# Altium PCB RF-UNIT-QRP.PcbDoc (part 3 of 3)
Units mm, origin at the board's own origin, x right, y up, seen from the top; angles counter-clockwise.
Board outline 187 x 77 mm, 2 copper layers (Top Layer, Top, Bottom Layer, Bottom); 258 components, 175 nets, 770 pads, 3772 vias.
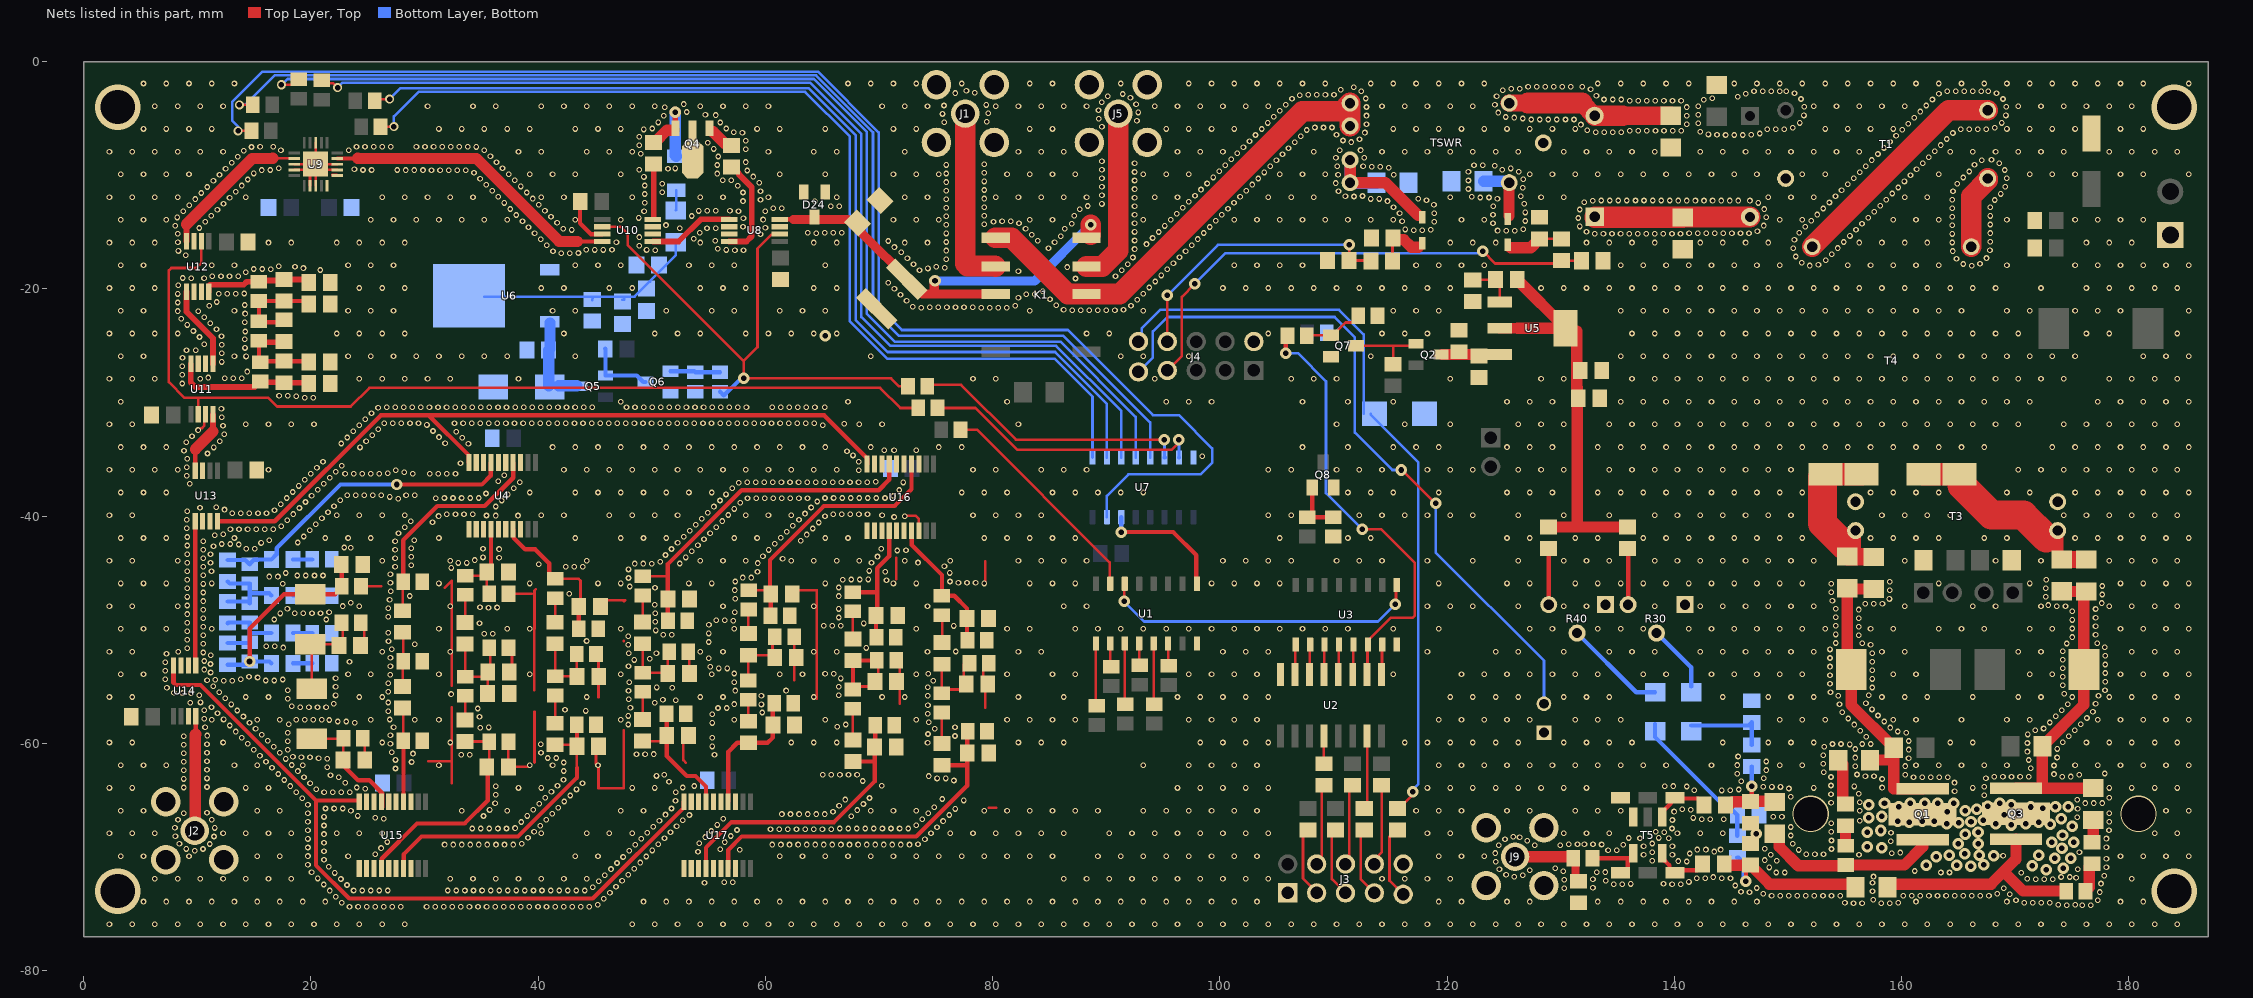
[diagram p3: the nets of this part, all layers, seen from the top]

## Via types
v1: diameter 0.5, hole 0.3, Top Layer, Top to Bottom Layer, Bottom, tented both sides, 3631 vias
v2: diameter 1.016, hole 0.486, Top Layer, Top to Bottom Layer, Bottom, tented both sides, 127 vias
v3: diameter 0.8, hole 0.486, Top Layer, Top to Bottom Layer, Bottom, tented both sides, 6 vias
v4: diameter 4, hole 3, Top Layer, Top to Bottom Layer, Bottom, 4 vias
v5: diameter 1, hole 0.5, Top Layer, Top to Bottom Layer, Bottom, 2 vias
v6: diameter 3.2, hole 3, Top Layer, Top to Bottom Layer, Bottom, 2 vias

## Nets (pads, with @x,y where several pads share a name; then routed paths per layer and width w, separated by ;. In a path a pad name is that pad's centre, name@x,y a point inside that pad or via, vN(x,y) a via of type N, cw(c..) or ccw(c..) an arc to the next point about the centre after c; other vN are vias at no path point) (continued)
GND: (continued)
  other v1: 147.271,-9.923 151.271,-9.923 153.271,-9.923 163.271,-9.923 171.271,-9.923 173.271,-9.923 175.271,-9.923 179.271,-9.923 181.271,-9.923 185.271,-9.923 14.976,-9.84 55.759,-9.852 75.918,-9.843 79.276,-9.788 34.356,-9.768 103.913,-9.752 92.496,-9.709 156.318,-9.727 121.879,-9.703 126.302,-9.701 99.942,-9.659 165.948,-9.665 58.413,-9.581 15.669,-9.543 16.423,-9.535 24.586,-9.534 25.34,-9.535 27.602,-9.539 28.356,-9.541 29.11,-9.542 29.864,-9.544 30.618,-9.545 31.372,-9.547 32.126,-9.548 32.88,-9.549 33.633,-9.551 169.078,-9.534 48.901,-9.517 89.622,-9.508 124.865,-9.502 23.833,-9.484 161.319,-9.476 12.49,-9.43 51.43,-9.435 17.161,-9.379 36.868,-9.385 52.07,-9.398 125.612,-9.397 114.86,-9.343 113.357,-9.254 114.111,-9.254 104.446,-9.219 110.328,-9.209 112.604,-9.208 156.851,-9.194 124.19,-9.166 100.475,-9.126 122.371,-9.132 123.125,-9.127 55.759,-9.098 75.918,-9.089 166.414,-9.073 79.276,-9.034 92.496,-8.955 161.852,-8.943 168.597,-8.953 13.023,-8.897 36.335,-8.852 58.287,-8.838 89.622,-8.754 104.979,-8.686 167.059,-8.683 157.384,-8.661 167.914,-8.635 101.008,-8.593 110.216,-8.463 112.716,-8.462 162.385,-8.41 13.557,-8.364 55.853,-8.349 35.801,-8.319 105.512,-8.152 49.044,-8.107 157.917,-8.128 101.542,-8.06 2.271,-7.923 4.271,-7.923 6.271,-7.923 8.271,-7.923 10.271,-7.923 12.271,-7.923 38.271,-7.923 40.271,-7.923 44.271,-7.923 46.271,-7.923 48.271,-7.923 60.271,-7.923 64.271,-7.923 66.271,-7.923 72.271,-7.923 82.271,-7.923 84.271,-7.923 86.271,-7.923 96.271,-7.923 98.271,-7.923 100.271,-7.923 108.271,-7.923 114.271,-7.923 116.271,-7.923 118.271,-7.923 120.271,-7.923 122.271,-7.923 124.271,-7.923 126.271,-7.923 130.271,-7.923 132.271,-7.923 134.271,-7.923 136.271,-7.923 138.271,-7.923 142.271,-7.923 144.271,-7.923 146.271,-7.923 148.271,-7.923 150.271,-7.923 152.271,-7.923 154.271,-7.923 156.271,-7.923 164.271,-7.923 166.271,-7.923 168.271,-7.923 170.271,-7.923 172.271,-7.923 174.271,-7.923 178.271,-7.923 180.271,-7.923 182.271,-7.923 184.271,-7.923 162.918,-7.877 14.09,-7.831 17.364,-7.802 23.326,-7.81 35.264,-7.789 110.546,-7.785 112.385,-7.784 58.287,-7.706 55.451,-7.681 106.046,-7.619 158.45,-7.595 102.075,-7.526 14.775,-7.515 15.528,-7.498 24.013,-7.499 29.291,-7.495 30.045,-7.497 30.799,-7.498 31.553,-7.5 32.307,-7.501 33.061,-7.502 33.815,-7.504 34.566,-7.505 16.675,-7.495 24.767,-7.487 25.521,-7.488 26.275,-7.489 27.029,-7.491 48.901,-7.367 163.451,-7.344 54.918,-7.148 106.579,-7.086 111.577,-7.079 158.983,-7.062 102.608,-6.993 58.287,-6.952 110.837,-6.939 112.287,-6.824 163.985,-6.81 48.901,-6.613 107.112,-6.553 159.517,-6.528 103.141,-6.46 144.51,-6.455 145.264,-6.455 146.018,-6.455 110.27,-6.441 143.756,-6.436 146.772,-6.446 143.002,-6.407 147.516,-6.324 164.518,-6.277 57.983,-6.262 112.768,-6.244 57.23,-6.214 133.072,-6.205 133.826,-6.205 134.58,-6.205 135.334,-6.205 142.291,-6.157 136.077,-6.078 136.831,-6.078 137.585,-6.078 138.339,-6.078 139.093,-6.078 139.847,-6.071 140.601,-6.068 132.335,-6.045 107.645,-6.02 160.05,-5.995 49.289,-5.966 148.174,-5.956 148.928,-5.956 149.682,-5.956 165.2,-5.956 165.954,-5.956 166.708,-5.956 167.462,-5.956 5.271,-5.923 7.271,-5.923 9.271,-5.923 11.271,-5.923 31.271,-5.923 33.271,-5.923 35.271,-5.923 37.271,-5.923 39.271,-5.923 43.271,-5.923 45.271,-5.923 47.271,-5.923 59.271,-5.923 61.271,-5.923 65.271,-5.923 71.271,-5.923 73.271,-5.923 83.271,-5.923 85.271,-5.923 95.271,-5.923 97.271,-5.923 99.271,-5.923 101.271,-5.923 103.674,-5.927 115.271,-5.923 117.271,-5.923 119.271,-5.923 121.271,-5.923 123.271,-5.923 125.271,-5.923 127.271,-5.923 129.271,-5.923 131.271,-5.923 153.271,-5.923 155.271,-5.923 157.271,-5.923 159.271,-5.923 169.271,-5.923 171.271,-5.923 173.271,-5.923 175.271,-5.923 179.271,-5.923 181.271,-5.923 50.038,-5.884 56.552,-5.886 150.424,-5.825 168.204,-5.825 108.366,-5.799 109.12,-5.799 109.874,-5.799 89.622,-5.738 131.778,-5.538 112.903,-5.502 141.103,-5.506 160.583,-5.462 142.091,-5.431 104.207,-5.394 151.043,-5.395 168.823,-5.395 50.571,-5.351 56.016,-5.356 75.743,-5.34 79.471,-5.29 92.702,-5.214 127.402,-5.09 128.156,-5.09 128.91,-5.09 129.664,-5.09 130.418,-5.09 131.172,-5.09 89.354,-5.033 126.653,-5.001 125.903,-4.923 161.116,-4.929 104.741,-4.861 125.15,-4.875 51.049,-4.768 112.903,-4.748 141.103,-4.752 151.406,-4.734 169.186,-4.734 55.641,-4.702 142.091,-4.677 54.724,-4.667 75.586,-4.602 79.608,-4.548 124.508,-4.48 92.825,-4.47 53.094,-4.432 161.649,-4.396 105.274,-4.327 89.318,-4.28 51.14,-4.019 112.903,-3.994 141.103,-3.998 151.443,-3.98 169.223,-3.98 6.271,-3.923 8.271,-3.923 10.271,-3.923 12.271,-3.923 30.271,-3.923 34.271,-3.923 36.271,-3.923 40.271,-3.923 42.271,-3.923 44.271,-3.923 46.271,-3.923 48.271,-3.923 50.271,-3.923 54.271,-3.923 56.271,-3.923 58.271,-3.923 60.271,-3.923 70.271,-3.923 72.271,-3.923 74.271,-3.923 80.271,-3.923 82.271,-3.923 84.271,-3.923 86.271,-3.923 88.271,-3.923 94.271,-3.923 96.271,-3.923 98.271,-3.923 100.271,-3.923 102.271,-3.923 104.271,-3.923 114.271,-3.923 116.271,-3.923 118.271,-3.923 120.271,-3.923 122.271,-3.923 142.107,-3.923 152.271,-3.923 154.271,-3.923 156.271,-3.923 158.271,-3.923 160.271,-3.923 170.271,-3.923 172.271,-3.923 174.271,-3.923 176.271,-3.923 178.271,-3.923 180.271,-3.923 162.182,-3.863 75.72,-3.86 79.453,-3.81 105.807,-3.794 124.209,-3.788 92.624,-3.743 52.806,-3.736 89.597,-3.58 136.067,-3.436 136.821,-3.436 137.575,-3.436 138.329,-3.436 139.083,-3.436 139.837,-3.443 140.591,-3.444 133.813,-3.332 134.567,-3.332 135.321,-3.33 142.591,-3.345 162.715,-3.33 151.145,-3.288 168.925,-3.288 106.348,-3.269 112.837,-3.243 143.335,-3.22 92.132,-3.172 145.587,-3.096 90.143,-3.059 124.356,-3.048 133.142,-2.989 107.032,-2.953 107.786,-2.926 108.54,-2.926 109.294,-2.926 110.048,-2.926 91.452,-2.845 146.296,-2.839 163.288,-2.839 150.575,-2.794 168.355,-2.794 76.716,-2.765 78.427,-2.744 112.44,-2.602 147.014,-2.609 147.767,-2.597 148.521,-2.597 149.275,-2.597 149.845,-2.604 164.006,-2.609 164.76,-2.597 165.514,-2.597 166.268,-2.597 167.022,-2.597 167.625,-2.604 77.696,-2.561 124.895,-2.521 110.653,-2.476 132.628,-2.437 125.636,-2.382 126.39,-2.382 111.772,-2.252 127.126,-2.217 127.88,-2.216 128.634,-2.216 129.388,-2.216 130.142,-2.216 130.896,-2.216 131.905,-2.223 5.271,-1.923 7.271,-1.923 9.271,-1.923 11.271,-1.923 13.271,-1.923 67.271,-1.923 69.271,-1.923 71.271,-1.923 73.271,-1.923 77.271,-1.923 83.271,-1.923 85.271,-1.923 91.271,-1.923 97.271,-1.923 99.271,-1.923 101.271,-1.923 103.271,-1.923 105.271,-1.923 107.271,-1.923 109.271,-1.923 113.271,-1.923 115.271,-1.923 117.271,-1.923 119.271,-1.923 121.271,-1.923 123.271,-1.923 133.271,-1.923 135.271,-1.923 137.271,-1.923 139.271,-1.923 141.271,-1.923 145.271,-1.923 147.271,-1.923 149.271,-1.923 151.271,-1.923 153.271,-1.923 155.271,-1.923 157.271,-1.923 159.271,-1.923 161.271,-1.923 163.271,-1.923 165.271,-1.923 167.271,-1.923 169.271,-1.923 171.271,-1.923 173.271,-1.923 175.271,-1.923 177.271,-1.923 179.271,-1.923 181.271,-1.923 185.271,-1.923
  other v2: 172.72,-71.12 174.244,-70.993 166.074,-70.824 171.514,-70.751 162.179,-70.739 164.846,-70.739 167.235,-70.679 173.482,-70.104 174.879,-70.104 163.068,-69.977 168.105,-69.881 164.211,-69.85 166.836,-69.845 172.085,-69.85 165.566,-69.7 158.239,-69.192 174.117,-69.215 156.972,-69.088 164.973,-68.834 166.751,-68.834 173.228,-68.707 175.133,-68.707 174.162,-68.067 165.602,-67.995 147.193,-67.945 156.972,-67.818 166.727,-67.814 158.167,-67.669 175.006,-67.31 169.672,-67.183 173.074,-67.124 163.957,-67.056 168.275,-67.056 170.942,-67.056 165.022,-66.979 160.67,-66.943 166.11,-66.907 172.085,-66.929 162.882,-66.871 159.654,-66.834 161.83,-66.834 167.198,-66.762 174.053,-66.653 157.099,-66.548 158.239,-66.435 169.037,-66.294 170.307,-66.167 164.039,-66.015 165.608,-65.913 166.624,-65.786 172.421,-65.71 171.369,-65.601 159.763,-65.565 173.546,-65.565 174.67,-65.565 167.597,-65.528 157.099,-65.405 169.672,-65.405 158.496,-65.278 160.782,-65.278 162.052,-65.278 163.195,-65.278 164.592,-65.278 168.656,-65.278 65.278,-24.13
  other v4: 3,-73 184,-73 3,-4 184,-4
  other v6: 152,-66.2 180.848,-66.2
LNA_ON: R31.2 R84.1 U8.2 U10.2 | length 49.9
  Top Layer, Top w0.23: U10.2@45.654,-14.534 47.3,-14.534 47.879,-15.113 47.879,-16.129 58.094,-26.344 ; U8.2@61.28,-15.184 61.245,-15.219 60.55,-15.219 59.309,-16.46 59.309,-25.129 58.094,-26.344 ; R84.1@72.556,-28.575 71.755,-28.575 71.062,-27.882 v2(58.094,-27.882) 58.094,-26.344
  Bottom Layer, Bottom w0.381: R31.2@56.007,-29.044 56.344,-29.381 57.843,-27.882 v2(58.094,-27.882)
LPF_ON: R85.1 U11.2 U12.2 | length 84.6
  Top Layer, Top w0.23: U11.2@10.089,-31.054 10.089,-29.647 10.033,-29.591 ; U12.2@10.358,-15.809 10.358,-17.709 9.906,-18.161 7.716,-18.161 7.493,-18.384 7.493,-28.194 8.89,-29.591 10.033,-29.591 ; R85.1@73.445,-30.48 71.882,-30.48 70.104,-28.702 66.725,-28.702 66.719,-28.708 25.14,-28.708 23.495,-30.353 17.018,-30.353 16.256,-29.591 10.033,-29.591
MB_ALC: D2.1 J4.10 R12.2 | length 66.7
  Top Layer, Top w0.23: R12.2@115.63,-65.731 115.73,-65.731 116.845,-64.615 116.845,-64.384 v2(116.967,-64.262)
  Bottom Layer, Bottom w0.23: J4.10@92.837,-24.638 93.118,-24.357 93.118,-23.468 94.742,-21.844 110.49,-21.844 112.649,-24.003 D2.1@112.649,-30.988 ; D2.1@113.284,-30.988 113.284,-31.084 117.475,-35.275 117.475,-63.564 116.967,-64.072 v2(116.967,-64.262)
MB_THERM: J4.9 R13.2 R14.2 | length 64.3
  Top Layer, Top w0.23: v2(115.951,-35.941) 116.014,-35.941 118.935,-38.862 v2(118.999,-38.862)
  Bottom Layer, Bottom w0.23: J4.9@92.837,-27.305 94.107,-26.035 94.107,-23.749 95.377,-22.479 110.109,-22.479 110.807,-23.177 ; R13.2@109.601,-23.876 110.109,-23.876 110.807,-23.177 ; v2(115.951,-35.941) 115.189,-35.941 111.887,-32.639 111.887,-24.257 110.807,-23.177 ; v2(118.999,-38.862) 118.999,-43.18 128.524,-52.705 R14.2@128.524,-56.515
NetC5_1: C5.1 C6.2 L2.2 | length 4.8
  Top Layer, Top w0.23: C6.2@28.07,-54.993 28.07,-52.812 L2.2@28.116,-52.766 28.116,-50.272 C5.1@28.07,-50.226
NetC5_2: C5.2 L1.2 U4.4 | length 19.5
  Top Layer, Top w0.23: C5.2@28.07,-48.326 28.07,-45.827 L1.2@28.116,-45.781
  Top Layer, Top w0.381: L1.2@28.116,-45.781 28.116,-42.115 31.115,-39.116 35.306,-39.116 37.805,-36.617 U4.4@37.805,-35.289
NetC6_1: C6.1 L3.2 U15.4 | length 8.3
  Top Layer, Top w0.23: L3.2@28.07,-59.797 L3.2@28.116,-59.751 28.116,-56.94 C6.1@28.07,-56.893
  Top Layer, Top w0.381: L3.2@28.07,-59.797 28.153,-59.88 U15.4@28.153,-65.134
NetC7_2: C7.2 C11.1 C14.2 L5.2 L8.1 | length 9.2
  Top Layer, Top w0.23: C11.1@33.577,-51.265 L8.1@33.577,-54.123 35.164,-54.123 C14.2@35.565,-53.722 ; C7.2@35.553,-55.626 35.565,-55.614 C14.2@35.565,-53.722 ; L5.2@35.687,-51.583 35.799,-51.695 35.799,-53.488 C14.2@35.565,-53.722
NetC8_1: C8.1 C9.2 C17.1 L49.2 L50.1 | length 7.7
  Bottom Layer, Bottom w0.381: C9.2@12.673,-47.516 14.457,-47.516 L50.1@14.605,-47.664 14.605,-46.8 ; C8.1@12.673,-45.759 12.849,-45.935 L49.2@14.605,-45.935 14.605,-46.8 ; C17.1@16.522,-46.99 16.332,-46.8 14.605,-46.8
NetC8_2: C8.2 C16.1 L49.1 U4.7 | length 28
  Top Layer, Top w0.381: v5(27.559,-37.211) 35.052,-37.211 35.82,-36.443 35.82,-35.324 U4.7@35.855,-35.289
  Bottom Layer, Bottom w0.381: C8.2@12.673,-43.859 14.229,-43.859 L49.1@14.605,-44.235 15.015,-43.825 15.352,-43.825 15.363,-43.815 C16.1@16.522,-43.815 16.982,-43.355 16.982,-42.835 22.606,-37.211 v5(27.559,-37.211)
NetC9_1: C9.1 C10.2 C18.1 L50.2 L51.1 | length 7.6
  Bottom Layer, Bottom w0.381: C10.2@12.673,-51.174 14.524,-51.174 L51.1@14.605,-51.093 14.605,-50.229 ; C9.1@12.673,-49.416 12.725,-49.364 L50.2@14.605,-49.364 14.605,-50.229 ; C18.1@16.522,-50.292 14.668,-50.292 14.605,-50.229
NetC10_1: C10.1 C19.1 C86.2 C88.2 L34.2 L51.2 | length 18.6
  Top Layer, Top w0.381: v5(14.605,-52.793) 14.605,-49.911 17.635,-46.881 C86.2@19.939,-46.881 22.132,-46.881 22.716,-46.297 L34.2@22.716,-46.173 22.716,-44.309 C88.2@22.675,-44.268
  Bottom Layer, Bottom w0.381: C10.1@12.673,-53.074 14.324,-53.074 v5(14.605,-52.793) 16.356,-52.793 C19.1@16.522,-52.959
NetC11_2: C11.2 L7.2 | length 2.4
  Top Layer, Top w0.23: C11.2@33.577,-49.365 L7.2@33.577,-46.933
NetC12_1: C12.1 C15.2 L6.2 U15.14 | length 19.7
  Top Layer, Top w0.23: C12.1@33.577,-59.838 L6.2@35.687,-59.838 35.687,-61.86 C15.2@35.487,-62.06
  Top Layer, Top w0.381: U15.14@26.203,-71.01 26.238,-70.975 26.238,-70.155 29.337,-67.056 33.528,-67.056 35.56,-65.024 35.56,-62.133 C15.2@35.487,-62.06
NetC12_2: C12.2 L8.2 | length 2.1
  Top Layer, Top w0.23: C12.2@33.577,-57.938 L8.2@33.577,-55.823
NetC13_2: C13.2 L4.2 L7.1 U4.14 | length 7.9
  Top Layer, Top w0.23: L7.1@33.577,-45.233 35.169,-45.233 C13.2@35.487,-44.915 35.487,-46.62 L4.2@35.687,-46.82
  Top Layer, Top w0.381: C13.2@35.487,-44.915 35.855,-44.547 U4.14@35.855,-41.165
NetC16_2: C16.2 L52.2 | length 1.7
  Bottom Layer, Bottom w0.381: C16.2@18.422,-43.815 L52.2@20.13,-43.815
NetC17_2: C17.2 L53.2 | length 1.7
  Bottom Layer, Bottom w0.381: C17.2@18.422,-46.99 L53.2@20.13,-46.99
NetC18_2: C18.2 L54.2 | length 1.7
  Bottom Layer, Bottom w0.381: C18.2@18.422,-50.292 L54.2@20.13,-50.292
NetC19_2: C19.2 L55.2 | length 1.7
  Bottom Layer, Bottom w0.381: C19.2@18.422,-52.959 L55.2@20.13,-52.959
NetC20_2: C20.2 L12.2 | length 2.1
  Top Layer, Top w0.23: C20.2@41.504,-49.335 L12.2@41.504,-47.22
NetC21_1: C21.1 C24.2 L11.2 U15.17 | length 25.9
  Top Layer, Top w0.23: C21.1@41.504,-60.125 43.389,-60.125 43.389,-62.005 43.414,-62.03
  Top Layer, Top w0.381: U15.17@28.153,-71.01 28.188,-70.975 28.188,-69.748 29.736,-68.199 38.227,-68.199 43.414,-63.012 43.414,-62.157 ; L11.2@43.389,-58.347 43.414,-58.372 C24.2@43.414,-60.252
NetC21_2: C21.2 L13.2 | length 2.4
  Top Layer, Top w0.23: C21.2@41.504,-58.225 L13.2@41.504,-55.792
NetC22_2: C22.2 L9.2 L12.1 U4.17 | length 12.4
  Top Layer, Top w0.23: L12.1@41.504,-45.52 43.573,-45.52 43.731,-45.678 43.731,-47.306 C22.2@43.726,-47.311
  Top Layer, Top w0.381: U4.17@37.805,-41.165 37.84,-41.2 37.84,-41.907 38.858,-42.926 39.751,-42.926 40.969,-44.144 40.969,-45.11 41.379,-45.52 L12.1@41.504,-45.52 ; L9.2@43.576,-49.893 43.581,-49.888 C22.2@43.581,-47.943
NetC32_1: C32.1 C35.2 L15.2 L18.1 | length 6.7
  Top Layer, Top w0.23: C32.1@49.192,-51.229 L18.1@49.192,-53.769 51.334,-53.769 C35.2@51.415,-53.85 51.415,-52.058 L15.2@51.527,-51.945
NetC32_2: C32.2 L17.2 | length 2.3
  Top Layer, Top w0.23: C32.2@49.192,-49.329 L17.2@49.192,-46.989
NetC33_1: C33.1 C36.2 L16.2 U17.7 | length 11.5
  Top Layer, Top w0.23: C33.1@49.192,-59.802 C36.2@51.077,-59.802
  Top Layer, Top w0.381: L16.2@51.303,-57.404 51.328,-57.429 C36.2@51.328,-59.309 51.328,-61.107 53.086,-62.865 53.848,-62.865 54.778,-63.795 U17.7@54.778,-65.134
NetC33_2: C33.2 L18.2 | length 2.4
  Top Layer, Top w0.23: C33.2@49.192,-57.902 L18.2@49.192,-55.469
NetC34_2: C34.2 L14.2 L17.1 U16.7 | length 31.1
  Top Layer, Top w0.23: L17.1@49.192,-45.289 51.42,-45.289
  Top Layer, Top w0.381: 51.42,-45.387 C34.2@51.42,-47.292 51.42,-49.182 L14.2@51.435,-49.197 ; 51.42,-45.289 51.42,-44.211 57.912,-37.719 69.977,-37.719 70.907,-36.789 U16.7@70.907,-35.416
NetC38_1: C38.1 R27.2 R34.1 R42.2 | length 6.7
  Top Layer, Top w0.381: C38.1@144.514,-65.659 C38.1@144.526,-65.671 ; R42.2@146.703,-65.127 146.747,-65.084 146.812,-65.018 v2(146.812,-63.754)
  Top Layer, Top w1: C38.1@144.688,-65.575 145.135,-65.127 R42.2@146.703,-65.127 ; R42.2@146.747,-65.084 R34.1@148.077,-65.084
  Bottom Layer, Bottom w0.381: v2(146.812,-63.754) R27.2@146.812,-62.037
NetC38_2: C38.2 T5.1 T5.7 | length 5.1
  Top Layer, Top w0.381: T5.7@138.938,-66.482 138.938,-66.037 139.697,-65.278 139.697,-65.082 140.007,-64.772 T5.1@140.068,-64.772 140.142,-64.845 142.154,-64.845 142.614,-65.305 C38.2@142.614,-65.405
NetC44_1: C44.1 C47.2 L20.2 L23.1 | length 6.5
  Top Layer, Top w0.23: L23.1@58.496,-54.463 C44.1@58.496,-52.24 60.349,-52.24 60.626,-52.517 60.626,-50.817 L20.2@60.831,-50.612
NetC44_2: C44.2 L22.2 | length 2.1
  Top Layer, Top w0.23: C44.2@58.496,-50.34 L22.2@58.496,-48.225
NetC45_1: C45.1 C48.2 L21.2 U17.4 | length 11.9
  Top Layer, Top w0.381: U17.4@56.728,-65.134 56.728,-60.749 57.524,-59.952 C45.1@58.496,-59.952 60.19,-59.952 60.66,-59.482 C48.2@60.66,-58.377 60.66,-56.579 L21.2@60.767,-56.472
NetC45_2: C45.2 L23.2 | length 1.9
  Top Layer, Top w0.23: C45.2@58.496,-58.052 L23.2@58.496,-56.163
NetC46_2: C46.2 L19.2 L22.1 U16.4 | length 23.7
  Top Layer, Top w0.23: L22.1@58.496,-46.525 C46.2@60.381,-46.525
  Top Layer, Top w0.381: C46.2@60.406,-46.525 60.406,-43.861 65.151,-39.116 71.374,-39.116 72.857,-37.633 U16.4@72.857,-35.416 ; L19.2@60.447,-48.768 60.472,-48.743 C46.2@60.472,-46.863
NetC58_1: C58.1 C61.2 L25.2 L28.1 | length 9.3
  Top Layer, Top w0.23: L28.1@67.706,-55.26 67.975,-54.991 69.929,-54.991 69.929,-52.817 L25.2@69.816,-52.705
  Top Layer, Top w0.381: L28.1@67.706,-55.26 C58.1@67.706,-52.705 L25.2@69.816,-52.705
NetC58_2: C58.2 L27.2 | length 2.4
  Top Layer, Top w0.23: C58.2@67.706,-50.805 L27.2@67.706,-48.388
NetC59_1: C59.1 C62.2 L26.2 U17.14 | length 25.9
  Top Layer, Top w0.381: U17.14@54.778,-71.01 54.778,-69.174 57.023,-66.929 66.04,-66.929 69.616,-63.353 69.616,-61.595 ; C59.1@67.706,-61.595 69.616,-61.595 ; L26.2@69.657,-58.42 69.657,-60.284 C62.2@69.616,-60.325 69.616,-61.595
NetC59_2: C59.2 L28.2 | length 2.7
  Top Layer, Top w0.23: C59.2@67.706,-59.695 L28.2@67.706,-56.96
NetC60_2: C60.2 L24.2 L27.1 U16.14 | length 12
  Top Layer, Top w0.381: L27.1@67.706,-46.687 69.766,-46.687 69.85,-46.603 ; L24.2@69.784,-50.641 69.743,-50.6 C60.2@69.743,-48.736 69.85,-48.629 69.85,-46.603 ; U16.14@70.907,-41.292 70.907,-43.52 69.85,-44.577 69.85,-46.603
NetC72_1: C72.1 C75.2 L30.2 L33.1 | length 6.4
  Top Layer, Top w0.23: C72.1@75.563,-53.032 75.54,-53.054 75.54,-55.262 77.445,-55.262 77.445,-54.937 77.445,-53.078 L30.2@77.491,-53.032
NetC72_2: C72.2 L32.2 | length 2.4
  Top Layer, Top w0.23: L32.2@75.54,-48.714 75.563,-48.737 C72.2@75.563,-51.132
NetC73_1: C73.1 C76.2 L31.2 U17.17 | length 32.1
  Top Layer, Top w0.381: U17.17@56.728,-71.01 56.728,-69.383 57.912,-68.199 73.279,-68.199 77.761,-63.717 77.761,-61.976 ; C73.1@75.54,-61.922 77.707,-61.922 77.761,-61.976 ; L31.2@77.802,-58.928 77.761,-58.969 C76.2@77.761,-60.833 77.761,-61.976
NetC73_2: C73.2 L33.2 | length 2.7
  Top Layer, Top w0.23: C73.2@75.54,-60.022 L33.2@75.54,-57.287
NetC74_2: C74.2 L29.2 L32.1 U16.17 | length 12.3
  Top Layer, Top w0.381: U16.17@72.857,-41.292 72.892,-41.327 72.892,-42.539 75.54,-45.187 L32.1@75.54,-47.014 76.628,-47.014 77.744,-48.13 C74.2@77.744,-49.022 77.744,-50.886 L29.2@77.785,-50.927
NetC80_1: C80.1 R38.1 R43.1 R44.2 | length 16.2
  Top Layer, Top w0.381: v2(146.304,-72.136) 146.304,-71.112 R43.1@146.7,-70.716
  Top Layer, Top w1: C80.1@144.456,-70.425 144.747,-70.716 146.304,-70.716 R43.1@146.7,-70.716 148.369,-72.385 R38.1@155.829,-72.385
  Bottom Layer, Bottom w0.381: R44.2@145.542,-70.038 145.642,-70.038 146.102,-70.498 146.102,-71.762 146.304,-71.964 v2(146.304,-72.136)
NetC80_2: C80.2 T5.6 T5.10 | length 5.1
  Top Layer, Top w0.381: T5.10@138.938,-69.662 138.938,-70.107 139.57,-70.739 139.57,-71.062 139.88,-71.372 140.08,-71.172 142.027,-71.172 142.487,-70.712 C80.2@142.487,-70.612
NetC81_1: C81.1 R46.2 | length 2
  Top Layer, Top w1: R46.2@176.765,-68.699 176.866,-68.597 C81.1@176.866,-66.741
NetC81_2: C81.2 C93.1 C94.1 L38.2 Q3.1 R47.1 | length 27.9
  Top Layer, Top w1: Q3.1@170.076,-63.953 172.392,-63.953 ; C94.1@174.108,-46.613 174.124,-46.629 C93.1@176.257,-46.629 176.048,-46.837 L38.2@176.048,-53.491 176.048,-56.589 R47.1@172.392,-60.246 172.392,-63.953 ; C81.2@176.866,-63.942 172.392,-63.953
NetC86_1: C86.1 C87.2 C89.2 L35.2 | length 8.8
  Top Layer, Top w0.23: C87.2@20.066,-55.177 20.066,-51.408 C86.1@19.939,-51.281 22.666,-51.281 22.684,-51.298 22.804,-51.298 22.809,-51.303 22.809,-49.511 L35.2@22.697,-49.398
NetC87_1: C87.1 C90.2 L36.2 U15.7 | length 10.9
  Top Layer, Top w0.23: C87.1@20.066,-59.577 L36.2@22.856,-59.577 ; C90.2@22.833,-61.463 22.833,-59.6 L36.2@22.856,-59.577 ; L36.2@22.875,-59.558 L36.2@22.856,-59.577
  Top Layer, Top w0.381: C90.2@22.833,-61.463 22.833,-61.922 24.158,-63.246 25.146,-63.246 26.289,-64.389 U15.7@26.289,-65.614
NetC91_1: C91.1 C92.1 C111.2 L37.1 Q1.1 R48.2 | length 26.3
  Top Layer, Top w1: C111.2@157.229,-61.468 159.306,-61.468 ; C92.1@157.533,-46.408 155.28,-46.408 C91.1@155.219,-46.346 155.219,-53.152 L37.1@155.562,-53.496 155.562,-56.627 R48.2@159.306,-60.371 159.306,-61.468 ; Q1.1@161.852,-63.993 159.306,-63.993 159.306,-61.468
NetC91_2: C91.2 C92.2 T3.4 T4.1 T4.3 | length 14.2
  Top Layer, Top w0.381: T3.4@155.929,-41.302 T3.4@155.956,-41.275
  Top Layer, Top w1: C91.2@155.219,-43.546 C91.2@155.25,-43.577 ; C91.2@155.929,-43.18 T3.4@155.929,-41.302 ; C92.2@157.502,-43.577 C92.2@157.533,-43.608
  Top Layer, Top w1.5: C91.2@155.25,-43.577 C92.2@157.502,-43.577
  Top Layer, Top w2: T4.1@153.289,-36.322 T4.3@156.464,-36.322
  Top Layer, Top w2.54: T4.1@153.035,-36.576 153.035,-40.636 154.944,-42.545
NetC93_2: C93.2 C94.2 T3.1 T4.2 T4.4 | length 16.8
  Top Layer, Top w0.381: C94.2@173.736,-43.441 C94.2@174.108,-43.813
  Top Layer, Top w1: T3.1@173.609,-41.529 T3.1@173.609,-41.275 ; C94.2@173.736,-43.441 T3.1@173.736,-41.275 ; C93.2@176.241,-43.813 C93.2@176.257,-43.829
  Top Layer, Top w1.5: C94.2@174.108,-43.813 C93.2@176.241,-43.813
  Top Layer, Top w2: T4.2@161.925,-36.322 T4.4@164.338,-36.322
  Top Layer, Top w2.54: T4.4@165.33,-37.314 167.927,-39.911 170.721,-39.911 172.735,-41.925
NetC101_1: C101.1 C102.2 C107.2 L40.2 L41.1 | length 8.5
  Top Layer, Top w0.381: C102.2@17.653,-22.926 15.496,-22.926 L41.1@15.43,-22.86 L40.2@15.43,-21.068 17.651,-21.068 C101.1@17.653,-21.07 19.406,-21.07 C107.2@19.739,-21.402
NetC101_2: C101.2 C104.2 L40.1 U12.8 | length 9.6
  Top Layer, Top w0.5: U12.8@11.008,-20.259 11.008,-19.759 11.118,-19.649 14.079,-19.649 14.361,-19.367 L40.1@15.43,-19.367 15.529,-19.269 17.554,-19.269 C101.2@17.653,-19.17 19.543,-19.17 C104.2@19.805,-19.431
NetC102_1: C102.1 C103.2 C108.2 L41.2 L42.1 | length 8.5
  Top Layer, Top w0.381: L41.2@15.43,-24.56 15.43,-26.352 15.433,-26.355 C103.2@17.651,-26.355 19.744,-26.355 C108.2@19.805,-26.416
  Top Layer, Top w0.5: L41.2@15.43,-24.56 15.563,-24.693 17.52,-24.693 C102.1@17.653,-24.826
NetC103_1: C103.1 C110.2 L42.2 U11.8 | length 12.3
  Top Layer, Top w0.5: U11.8@9.439,-26.604 9.439,-28.235 9.844,-28.64 15.048,-28.64 L42.2@15.533,-28.155 15.583,-28.205 17.601,-28.205 C103.1@17.651,-28.255 19.612,-28.255 C110.2@19.678,-28.321
NetC111_1: C111.1 R32.2 | length 4.2
  Top Layer, Top w1: C111.1@154.429,-61.468 154.813,-61.852 154.813,-65.19 154.967,-65.344 R32.2@155.067,-65.344
NetC112_1: C112.1 Q4.1 | length 2.1
  Top Layer, Top w1: Q4.1@55.419,-6.176 55.419,-6.201 56.446,-7.228 56.873,-7.228 C112.1@57.023,-7.378
NetC112_2: C112.2 U8.8 | length 9
  Top Layer, Top w0.5: U8.8@56.83,-15.834 58.334,-15.834 58.801,-15.367 58.801,-11.056 57.658,-9.913 57.658,-9.813 57.123,-9.278 C112.2@57.023,-9.278
NetC113_1: C113.1 D1.1 R49.1 | length 4.8
  Top Layer, Top w0.23: C113.1@128.132,-15.604 130.071,-15.604 R49.1@130.078,-15.611
  Top Layer, Top w1: D1.1@125.603,-16.377 127.359,-16.377 C113.1@128.132,-15.604
NetC114_1: C114.1 D18.1 R27.1 | length 7.4
  Bottom Layer, Bottom w0.381: D18.1@141.478,-58.423 146.543,-58.423 C114.1@146.812,-58.154 R27.1@146.812,-60.137
NetC116_1: C116.1 D23.1 R44.1 | length 13.1
  Bottom Layer, Bottom w0.381: D23.1@138.303,-58.296 138.303,-59.436 144.726,-65.859 145.095,-65.859 145.542,-66.306 R44.1@145.542,-68.138
NetC117_2: C117.2 D3.1 R50.1 | length 4.6
  Top Layer, Top w0.23: R50.1@115.196,-17.542 115.196,-15.573 C117.2@115.236,-15.533
  Top Layer, Top w1: C117.2@115.236,-15.533 115.236,-15.649 116.169,-15.649 116.846,-16.325 117.452,-16.325
NetC120_1: C120.1 U10.8 | length 4.9
  Top Layer, Top w0.23: U10.8@50.104,-13.884 U10.8@50.165,-13.823
  Top Layer, Top w0.5: U10.8@50.165,-13.823 C120.1@50.165,-9.005
NetC120_2: C120.2 L46.2 Q4.3 | length 7.5
  Top Layer, Top w0.5: Q4.3@52.073,-5.831 v2@52.073,-4.448
  Top Layer, Top w1: C120.2@50.165,-7.105 50.265,-7.105 51.343,-6.027 Q4.3@51.944,-6.027 ; v2(52.07,-4.445) v2@52.073,-4.448
  Bottom Layer, Bottom w1: v2(52.07,-4.445) 52.073,-4.448 52.073,-8.237 L46.2@52.157,-8.322
NetC121_2: C121.2 C122.2 C127.2 C133.2 R39.1 U6.4 | length 20.3
  Bottom Layer, Bottom w0.23: U6.4@35.246,-20.68 C133.2@44.86,-20.68 ; C133.2@44.751,-20.981 44.751,-20.946 C133.2@44.765,-20.932 C133.2@44.86,-20.68 ; C121.2@47.416,-20.957 47.586,-20.957 C121.2@47.586,-20.68 ; C122.2@49.842,-19.363 C122.2@49.842,-19.324 ; C127.2@51.216,-17.943 C127.2@51.222,-17.943 ; R39.1@52.111,-15.892 52.111,-17.054 C127.2@51.222,-17.943 ; C133.2@44.86,-20.68 C121.2@47.586,-20.68 ; C121.2@47.586,-20.68 48.485,-20.68 C122.2@49.842,-19.324 ; C122.2@49.842,-19.324 C127.2@51.222,-17.943
NetC124_2: C124.2 L44.2 L45.1 | length 21.5
  Top Layer, Top w1.83: C124.2@140.74,-13.711 132.988,-13.711 L45.1@132.988,-13.659 140.74,-13.662 L44.2@146.654,-13.665
NetC126_2: C126.2 C136.2 Q2.3 U5.3 | length 7
  Top Layer, Top w0.23: Q2.3@119.577,-25.77 119.843,-25.503 C126.2@121.404,-25.503 ; U5.3@124.617,-25.77 U5.3@124.624,-25.763
  Top Layer, Top w1: Q2.3@119.577,-25.77 121.404,-25.77 122.809,-25.77 123.063,-25.77 U5.3@124.617,-25.77
NetC128_1: C128.1 C137.1 R28.2 R29.2 R52.1 U5.2 U5.4 | length 37.1
  Top Layer, Top w0.95: U5.2@124.624,-23.463 126.199,-23.463
  Top Layer, Top w1: 126.199,-23.463 U5.4@130.424,-23.463 ; R52.1@126.212,-19.239 130.424,-23.451 U5.4@130.424,-23.463 ; R29.2@128.905,-40.96 131.445,-40.96 ; R28.2@135.89,-40.96 131.445,-40.96 ; U5.4@130.424,-23.463 130.67,-23.709 131.421,-23.709 131.421,-27.178 131.421,-28.674 131.443,-28.674 131.444,-35.56 131.444,-40.959 131.445,-40.96
NetC129_1: C129.1 C130.2 Q5.3 U6.3 | length 7.3
  Bottom Layer, Bottom w0.381: C129.1@41.815,-28.638 C129.1@41.815,-28.524
  Bottom Layer, Bottom w0.95: 41.046,-23.955 U6.3@41.046,-22.98
  Bottom Layer, Bottom w1: C129.1@40.92,-28.522 C130.2@40.92,-25.387 41.046,-25.261 41.046,-23.955 ; C129.1@41.815,-28.524 Q5.3@43.401,-28.524
NetD1_2: D1.2 R56.1 TSWR.3 | length 5.2
  Top Layer, Top w1: D1.2@125.452,-13.577 125.452,-10.653 TSWR.3@125.466,-10.653
  Bottom Layer, Bottom w1: R56.1@123.227,-10.525 125.339,-10.525 TSWR.3@125.466,-10.653
NetD3_2: D3.2 R55.1 TSWR.4 TSWR.6 | length 13.5
  Top Layer, Top w1: TSWR.6@111.466,-8.653 TSWR.4@111.466,-10.653 114.579,-10.653 117.452,-13.525
  Bottom Layer, Bottom w1: TSWR.6@111.466,-8.653 TSWR.4@111.466,-10.653 111.538,-10.725 R55.1@113.762,-10.725
NetD18_2: D18.2 R30.2 | length 6
  Bottom Layer, Bottom w0.381: R30.2@138.43,-50.257 141.478,-53.305 D18.2@141.478,-54.991
NetD23_2: D23.2 R40.2 | length 9
  Bottom Layer, Bottom w0.381: R40.2@131.445,-50.292 136.649,-55.496 D23.2@138.303,-55.496
NetJ1_5: J1.5 K1.6 | length 16
  Top Layer, Top w1.83: J1.5@77.597,-4.572 77.597,-17.78 77.801,-17.984 80.215,-17.984 K1.6@80.265,-18.034
NetJ3_3: J3.3 R3.1 | length 6.2
  Top Layer, Top w0.23: R3.1@107.756,-67.631 107.315,-68.072 107.315,-71.882 108.518,-73.085 J3.3@108.518,-73.158
NetJ3_4: J3.4 R7.1 | length 7.2
  Top Layer, Top w0.23: J3.4@108.518,-70.618 108.966,-70.17 108.966,-63.881 R7.1@109.153,-63.694
NetJ3_5: J3.5 R8.1 | length 6.2
  Top Layer, Top w0.23: R8.1@110.169,-67.631 109.855,-67.945 109.855,-71.955 J3.5@111.058,-73.158
NetJ3_6: J3.6 R9.1 | length 7.2
  Top Layer, Top w0.23: J3.6@111.058,-70.618 111.379,-70.297 111.379,-63.973 111.658,-63.694 R9.1@111.693,-63.694
NetJ3_7: J3.7 R10.1 | length 6.2
  Top Layer, Top w0.23: R10.1@112.709,-67.631 112.395,-67.945 112.395,-71.955 J3.7@113.598,-73.158
NetJ3_8: J3.8 R11.1 | length 7.2
  Top Layer, Top w0.23: J3.8@113.598,-70.618 113.598,-70.23 114.233,-69.595 R11.1@114.233,-63.694
NetJ3_9: J3.9 R12.1 | length 6.5
  Top Layer, Top w0.23: R12.1@115.63,-67.631 115.53,-67.631 114.935,-68.226 114.935,-72.082 J3.9@116.138,-73.285
NetJ5_5: J5.5 K1.3 | length 15.4
  Top Layer, Top w1.83: K1.3@88.265,-18.034 89.647,-18.034 91.059,-16.622 J5.5@91.059,-4.572
NetL39_1: L39.1 Q1.3 R34.2 | length 16
  Top Layer, Top w1: R34.2@148.844,-67.948 148.944,-67.948 149.244,-68.248 149.244,-69.107 150.908,-70.771 154.996,-70.771 L39.1@155.067,-70.7 160.246,-70.7 161.852,-69.094 Q1.3@161.852,-68.493
NetL39_2: L39.2 R32.1 | length 1.8
  Top Layer, Top w1: L39.2@155.067,-69 R32.1@155.067,-67.244
NetL46_1: L46.1 R39.2 | length 1.8
  Bottom Layer, Bottom w0.23: R39.2@52.111,-13.092 52.157,-13.045 L46.1@52.157,-11.322
NetL47_1: L47.1 Q3.3 R38.2 | length 20.2
  Top Layer, Top w1: R38.2@158.75,-72.39 167.88,-72.385 168.978,-71.287 ; Q3.3@170.076,-68.453 170.076,-70.189 168.978,-71.287 ; L47.1@174.481,-72.996 170.688,-72.996 168.978,-71.287
NetL47_2: L47.2 R46.1 | length 2.6
  Top Layer, Top w0.381: L47.2@176.181,-72.996 L47.2@176.53,-72.648 ; R46.1@176.53,-70.834 R46.1@176.765,-70.599
  Top Layer, Top w1: L47.2@176.53,-72.648 R46.1@176.53,-70.834
NetL48_2: L48.2 T5.4 T5.11 | length 5.6
  Top Layer, Top w0.381: L48.2@132.803,-70.104 135.89,-70.104 ; T5.4@135.268,-71.372 135.58,-71.372 135.89,-71.062 135.89,-70.104 ; T5.11@136.398,-69.662 136.398,-69.914 136.208,-70.104 135.89,-70.104
NetQ2_1: Q2.1 Q7.3 R41.1 | length 7
  Top Layer, Top w0.23: Q7.3@111.971,-25.019 115.316,-25.019 ; R41.1@115.259,-26.632 115.259,-25.076 115.316,-25.019 ; Q2.1@117.039,-24.606 116.835,-24.811 116.835,-25.019 115.316,-25.019
NetQ5_1: Q5.1 Q6.3 R57.1 | length 6.1
  Bottom Layer, Bottom w0.381: R57.1@45.913,-25.273 45.931,-25.291 Q5.1@45.931,-27.625 48.677,-27.625 49.246,-28.194 Q6.3@49.446,-28.194
NetQ6_1: Q6.1 R31.1 R33.2 | length 4.4
  Bottom Layer, Bottom w0.381: Q6.1@51.646,-27.244 53.748,-27.244 R33.2@53.848,-27.344 R31.1@56.007,-27.344
NetQ7_1: Q7.1 R37.1 R45.2 | length 5.3
  Top Layer, Top w0.23: R37.1@107.657,-24.13 107.718,-24.069 Q7.1@109.771,-24.069 109.971,-24.069 111.078,-22.962 111.695,-22.962 112.18,-22.477 R45.2@112.18,-22.352
NetQ8_1: Q8.1 R65.1 R70.2 | length 5.1
  Top Layer, Top w0.381: Q8.1@108.139,-37.476 108.139,-39.688 107.73,-40.098 R65.1@107.692,-40.098 R70.2@109.978,-40.098
NetR28_1: R28.1 R30.3 | length 4.9
  Top Layer, Top w0.381: R28.1@135.89,-42.86 135.93,-42.9 R30.3@135.93,-47.757
NetR29_1: R29.1 R40.3 | length 4.9
  Top Layer, Top w0.381: R29.1@128.905,-42.86 128.945,-42.9 R40.3@128.945,-47.792
NetR52_2: R52.2 R53.1 U5.1 | length 4.1
  Top Layer, Top w0.23: R53.1@122.258,-19.207 124.279,-19.207 124.312,-19.239 124.624,-19.551 U5.1@124.624,-21.163
NetR71_2: R71.2 U1.15 | length 19.9
  Top Layer, Top w0.23: R71.2@77.177,-32.385 78.613,-32.385 90.297,-44.069 90.297,-45.882 U1.15@90.364,-45.949
NetR72_2: R72.2 U1.1 | length 5.5
  Top Layer, Top w0.23: U1.1@89.094,-51.199 89.094,-56.621 R72.2@89.154,-56.681
NetR73_2: R73.2 U1.2 | length 2.1
  Top Layer, Top w0.23: U1.2@90.364,-51.199 90.364,-53.192 R73.2@90.424,-53.252
NetR74_2: R74.2 U1.3 | length 5.4
  Top Layer, Top w0.23: U1.3@91.634,-51.199 91.634,-56.494 R74.2@91.694,-56.554
NetR75_2: R75.2 U1.4 | length 2
  Top Layer, Top w0.23: U1.4@92.904,-51.199 92.904,-53.065 R75.2@92.964,-53.125
NetR76_2: R76.2 U1.5 | length 5.4
  Top Layer, Top w0.23: U1.5@94.174,-51.199 94.174,-56.494 R76.2@94.234,-56.554
NetR77_2: R77.2 U1.6 | length 2
  Top Layer, Top w0.23: U1.6@95.444,-51.199 95.444,-53.104 R77.2@95.504,-53.164
NetR78_2: R78.2 U7.15 | length 127.6
  Top Layer, Top w0.23: v3(13.589,-6.096) R78.2@14.771,-6.096
  Bottom Layer, Bottom w0.23: v3(13.589,-6.096) 13.589,-5.715 13.074,-5.2 13.074,-3.544 15.729,-0.889 64.643,-0.889 69.977,-6.223 69.977,-21.59 72.009,-23.622 86.614,-23.622 94.107,-31.115 96.393,-31.115 99.314,-34.036 99.314,-35.306 98.298,-36.322 91.948,-36.322 90.057,-38.213 U7.15@90.057,-40.09
NetR79_2: R79.2 U7.1 | length 90.4
  Top Layer, Top w0.23: R79.2@26.123,-5.715 v3(27.305,-5.715)
  Bottom Layer, Bottom w0.23: v3(27.305,-5.715) 27.305,-4.826 29.477,-2.654 63.487,-2.654 67.437,-6.604 67.437,-22.86 70.739,-26.162 85.471,-26.162 88.787,-29.478 U7.1@88.787,-34.84
NetR80_2: R80.2 U7.2 | length 90.7
  Top Layer, Top w0.23: R80.2@25.615,-3.429 25.742,-3.302 v3(26.924,-3.302)
  Bottom Layer, Bottom w0.23: v3(26.924,-3.302) 27.891,-2.335 63.803,-2.335 67.945,-6.477 67.945,-22.733 70.77,-25.558 85.502,-25.558 90.057,-30.113 U7.2@90.057,-34.84
NetR81_2: R81.2 U7.3 | length 96.3
  Top Layer, Top w0.23: R81.2@20.955,-1.651 21.209,-1.905 21.971,-1.905 v3(22.352,-2.286)
  Bottom Layer, Bottom w0.23: v3(22.352,-2.286) 22.792,-1.846 63.949,-1.846 68.453,-6.35 68.453,-22.479 70.993,-25.019 85.598,-25.019 91.327,-30.748 U7.3@91.327,-34.84
NetR82_2: R82.2 U7.4 | length 102.4
  Top Layer, Top w0.23: v3(17.399,-2.032) 18.376,-2.032 18.884,-1.524 R82.2@18.923,-1.563
  Bottom Layer, Bottom w0.23: v3(17.399,-2.032) 17.442,-2.032 17.947,-1.527 64.265,-1.527 68.926,-6.188 68.926,-22.19 71.374,-24.638 85.979,-24.638 92.597,-31.256 U7.4@92.597,-34.84
NetR83_2: R83.2 U7.5 | length 107.3
  Top Layer, Top w0.23: v3(13.716,-3.81) R83.2@14.898,-3.81
  Bottom Layer, Bottom w0.23: v3(13.716,-3.81) 14.205,-3.81 16.807,-1.208 64.454,-1.208 69.469,-6.223 69.469,-21.844 71.752,-24.127 86.23,-24.127 93.867,-31.764 U7.5@93.867,-34.84
NetR84_2: R84.2 U7.6 | length 24.5
  Top Layer, Top w0.23: R84.2@74.256,-28.575 74.383,-28.448 77.216,-28.448 82.042,-33.274 v2(95.123,-33.274)
  Bottom Layer, Bottom w0.23: U7.6@95.13,-34.833 v2@95.13,-33.281
  Bottom Layer, Bottom w0.381: v2(95.123,-33.274) v2@95.13,-33.281 ; U7.6@95.13,-34.833 U7.6@95.137,-34.84
NetR85_2: R85.2 U7.7 | length 24.9
  Top Layer, Top w0.23: R85.2@75.145,-30.48 78.486,-30.48 82.169,-34.163 95.758,-34.163 96.393,-33.528 v2(96.393,-33.274)
  Bottom Layer, Bottom w0.23: U7.7@96.4,-34.833 v2@96.4,-33.281
  Bottom Layer, Bottom w0.381: v2(96.393,-33.274) v2@96.4,-33.281 ; U7.7@96.4,-34.833 U7.7@96.407,-34.84
NetT1_2: T1.2 T4.6 | length 6.6
  Top Layer, Top w1.83: T4.6@166.131,-16.289 166.131,-11.857 167.576,-10.412 T1.2@167.576,-10.276
NetT1_4: T1.4 T4.5 | length 20.4
  Top Layer, Top w1.83: T4.5@152.131,-16.289 164.144,-4.276 T1.4@167.576,-4.276
NetU1_9: U1.9 U7.14 | length 11.3
  Top Layer, Top w0.381: v2(91.313,-41.402) 95.885,-41.402 97.917,-43.434 97.917,-45.882 U1.9@97.984,-45.949
  Bottom Layer, Bottom w0.381: v2(91.313,-41.402) 91.32,-41.395 91.32,-40.097 U7.14@91.327,-40.09
NetU1_14: U1.14 U3.9 | length 28.6
  Top Layer, Top w0.23: v2@91.6,-47.465 U1.14@91.6,-45.982 ; v2(115.443,-47.752) 115.506,-47.689 115.506,-46.122 U3.9@115.57,-46.058
  Top Layer, Top w0.381: v2(91.567,-47.498) v2@91.6,-47.465 ; U1.14@91.6,-45.982 U1.14@91.634,-45.949
  Bottom Layer, Bottom w0.23: v2(91.567,-47.498) 93.345,-49.276 113.919,-49.276 v2(115.443,-47.752)
NetU2_1: U2.1 U3.7 | length 2.7
  Top Layer, Top w0.23: U2.1@114.233,-53.948 114.266,-53.914 114.266,-51.342 U3.7@114.3,-51.308
NetU2_3: U2.3 U3.5 | length 2.7
  Top Layer, Top w0.23: U2.3@111.693,-53.948 111.726,-53.914 111.726,-51.342 U3.5@111.76,-51.308
NetU2_4: U2.4 U3.4 | length 2.7
  Top Layer, Top w0.23: U2.4@110.423,-53.948 110.456,-53.914 110.456,-51.342 U3.4@110.49,-51.308
NetU2_5: U2.5 U3.3 | length 2.7
  Top Layer, Top w0.23: U2.5@109.153,-53.948 109.186,-53.914 109.186,-51.342 U3.3@109.22,-51.308
NetU2_6: U2.6 U3.2 | length 2.7
  Top Layer, Top w0.23: U2.6@107.883,-53.948 107.916,-53.914 107.916,-51.342 U3.2@107.95,-51.308
NetU2_7: U2.7 U3.1 | length 2.7
  Top Layer, Top w0.23: U2.7@106.613,-53.948 106.646,-53.914 106.646,-51.342 U3.1@106.68,-51.308
NetU4_10: U4.10 U13.8 U16.10 | length 68.8
  Top Layer, Top w0.381: U13.8@11.77,-40.452 16.825,-40.452 26.162,-31.115 30.353,-31.115 ; U4.10@33.905,-35.289 33.905,-34.667 30.353,-31.115 ; U16.10@68.957,-35.416 68.957,-34.903 65.169,-31.115 30.353,-31.115
NetU8_5: U8.5 U10.5 | length 7.5
  Top Layer, Top w0.5: U10.5@50.104,-15.834 52.365,-15.834 54.315,-13.884 U8.5@56.83,-13.884
NetU11_5: U11.5 U12.5 | length 7.3
  Top Layer, Top w0.5: U12.5@9.058,-20.259 9.058,-22.012 11.389,-24.343 U11.5@11.389,-26.604
NetU13_5: U13.5 U14.5 | length 12.7
  Top Layer, Top w0.381: U14.5@9.82,-53.147 U13.5@9.82,-40.452
NetU14_8: U14.8 U15.10 U17.10 | length 65.4
  Top Layer, Top w0.381: 7.915,-54.651 8.128,-54.864 10.287,-54.864 20.447,-65.024 ; U15.10@24.253,-65.134 24.253,-65.059 24.218,-65.024 20.447,-65.024 ; U17.10@52.828,-65.134 52.828,-65.647 44.815,-73.66 23.368,-73.66 20.447,-70.739 20.447,-65.024
  Top Layer, Top w0.45: 7.915,-54.651 U14.8@7.915,-53.147
PTT_OUT: R10.2 U2.15 | length 6.5
  Top Layer, Top w0.23: R10.2@112.709,-65.731 112.963,-65.477 U2.15@112.963,-59.348
RF_TX_IN: C55.2 J9.5 L48.1 | length 7.4
  Top Layer, Top w0.381: L48.1@130.976,-69.977 L48.1@131.103,-70.104 L48.1@131.318,-70.319 ; C55.2@131.318,-71.875 C55.2@131.572,-72.129
  Top Layer, Top w0.7: C55.2@131.318,-71.875 L48.1@131.318,-70.319
  Top Layer, Top w1: J9.5@125.984,-69.977 L48.1@130.976,-69.977
RX_ATT_LPF: U9.2 U12.4 | length 13.4
  Top Layer, Top w0.23: 16.637,-8.509 U9.2@18.522,-8.529
  Top Layer, Top w0.5: U12.4@9.058,-15.809 9.058,-14.31
  Top Layer, Top w1: 9.058,-14.31 9.906,-13.462 14.839,-8.529 16.637,-8.509
RX_BPF_OUT: J2.5 U14.4 | length 10.2
  Top Layer, Top w0.381: J2.5@9.758,-67.67 J2.5@9.779,-67.691 J2.5@9.83,-67.64 ; 9.865,-59.182 U14.4@9.865,-57.597
  Top Layer, Top w1: J2.5@9.83,-67.64 9.83,-59.217 9.865,-59.182
RX_IN_LNA: D24.3 K1.4 K1.7 R1.2 U8.4 U18.1 | length 39.5
  Top Layer, Top w0.381: U8.4@61.28,-13.884 62.484,-13.884 ; R1.2@67.279,-13.884 R1.2@67.401,-14.006 ; 74.803,-20.444 74.864,-20.383 ; v2@74.864,-19.37 v2(74.93,-19.304)
  Top Layer, Top w0.8: 62.484,-13.884 R1.2@67.279,-13.884 ; R1.2@67.401,-14.006 73.839,-20.444 74.803,-20.444 K1.7@80.265,-20.444 ; 74.864,-20.383 v2@74.864,-19.37
  Top Layer, Top w1.83: K1.4@88.646,-15.234 v2(88.646,-14.351)
  Bottom Layer, Bottom w0.8: v2(74.93,-19.304) 83.693,-19.304 v2(88.646,-14.351)
RX_LNA_ATT: U9.14 U10.4 | length 26.4
  Top Layer, Top w0.381: U9.14@22.322,-8.529 24.13,-8.509 ; 43.434,-15.834 U10.4@45.654,-15.834
  Top Layer, Top w1: 24.13,-8.509 34.564,-8.529 41.869,-15.834 43.434,-15.834
RX_LPF_BPF: U11.4 U13.4 | length 5.6
  Top Layer, Top w0.381: U13.4@9.82,-36.002 9.82,-34.122 9.842,-34.1
  Top Layer, Top w0.5: 11.389,-32.553 U11.4@11.389,-31.054
  Top Layer, Top w1: 9.842,-34.1 11.389,-32.553
SWR_DET_BACKW: J4.8 R50.2 R54.2 | length 25.2
  Top Layer, Top w0.089: R54.2@111.377,-17.501 R54.2@111.379,-17.498
  Top Layer, Top w0.23: J4.8@95.377,-24.638 v2(95.377,-20.574) ; R54.2@111.377,-17.501 113.255,-17.501 R50.2@113.296,-17.542 ; R54.2@111.379,-17.498 v2(111.379,-16.129)
  Bottom Layer, Bottom w0.23: v2(95.377,-20.574) 99.822,-16.129 v2(111.379,-16.129)
SWR_DET_FORW: J4.7 R36.1 R49.2 | length 44.6
  Top Layer, Top w0.23: J4.7@95.377,-27.178 96.647,-25.908 96.647,-20.701 v2(97.79,-19.558) ; v2(123.14,-16.677) 124.225,-17.763 130.078,-17.763 R49.2@130.078,-17.511 130.09,-17.523 R36.1@131.823,-17.523
  Bottom Layer, Bottom w0.23: v2(97.79,-19.558) 100.469,-16.879 122.725,-16.879 122.927,-16.677 v2(123.14,-16.677)
SWR_OUT: K1.2 K1.5 TSWR.2 TSWR.5 | length 44.2
  Top Layer, Top w1.83: K1.5@80.265,-15.494 81.661,-15.494 86.611,-20.444 K1.2@88.265,-20.444 88.268,-20.447 91.186,-20.447 107.27,-4.363 110.756,-4.363 TSWR.2@111.466,-3.653 TSWR.5@111.466,-5.653
  Bottom Layer, Bottom w1.5: TSWR.5@111.466,-5.653 TSWR.2@111.466,-3.653
TUNE_OUT: R7.2 U2.12 | length 2.4
  Top Layer, Top w0.23: R7.2@109.153,-61.794 U2.12@109.153,-59.348
TX_LPF_OUT: C125.2 L45.2 TSWR.1 | length 14.7
  Top Layer, Top w1.5: TSWR.1@125.466,-3.653 127.131,-3.653
  Top Layer, Top w1.6: 131.872,-3.653 L45.2@132.988,-4.769 ; 135.43,-4.757 C125.2@139.689,-4.757
  Top Layer, Top w1.83: 127.131,-3.653 131.872,-3.653 ; L45.2@132.988,-4.769 135.419,-4.769 135.43,-4.757
TXAMP: R37.2 U2.2 U3.6 | length 39
  Top Layer, Top w0.23: v2(112.522,-41.148) 114.173,-41.148 117.158,-44.133 117.158,-48.735 116.934,-48.958 115.03,-48.958 113.03,-50.958 U3.6@113.03,-51.308 112.996,-51.342 112.996,-53.914 U2.2@112.963,-53.948
  Top Layer, Top w0.381: v2(105.791,-25.654) 105.791,-24.296 R37.2@105.957,-24.13
  Bottom Layer, Bottom w0.23: v2(105.791,-25.654) 106.87,-25.654 109.347,-28.131 109.347,-37.973 v2(112.522,-41.148)
"Сеть 105": C20.1 C23.2 L10.2 L13.1 | length 6.7
  Top Layer, Top w0.23: C20.1@41.504,-51.235 L13.1@41.504,-54.092 43.357,-54.092 43.409,-54.041 43.409,-52.156 L10.2@43.389,-52.136
pads on no net: T5.2 T5.5 T5.8 U1.7 U7.9

## Polygon pours and split planes (outlines as drawn)
GND on Top Layer, Top "Bottom Layer, Bottom-GND" (solid, remove dead copper, pour order 10): 0,0 186.939,0 186.939,-77.061 0,-77
NetC128_1 on Top Layer, Top "Top Layer, Top-Сеть 31" (solid, pour order 0): 127,-21 127,-26 134,-26 134,-21
GND on Bottom Layer, Bottom "Bottom Layer, Bottom-GND" (solid, remove dead copper, pour order 6): 0,-0.206 186.939,-0.206 186.939,-77 0,-77
NetC121_2 on Bottom Layer, Bottom "Bottom Layer, Bottom-Сеть 141" (solid, pour order 4): 29,-16 29,-24 39,-24 39,-16

## Keep-outs
Keep-Out Layer, Board:
  lines w0.127: 0,-77.088 0,0 187,0 187,-77
  lines w0.14: 0,-77.088 186.999,-77.088 ; 0,-77 0,0 187,0 187,-77

## Silkscreen, mask and mechanical layers (free items; w line width, h text height)
Top Overlay, Top Silk:
  region: 110.207,-7.193 110.202,-7.248 110.188,-7.302 110.164,-7.352 110.132,-7.397 110.093,-7.436 110.048,-7.468 109.998,-7.491 109.944,-7.506 109.889,-7.511 109.834,-7.506 109.781,-7.491 109.73,-7.468 109.685,-7.436 109.646,-7.397 109.614,-7.352 109.591,-7.302 109.577,-7.248 109.572,-7.193 109.577,-7.138 109.591,-7.085 109.614,-7.034 109.646,-6.989 109.685,-6.95 109.73,-6.918 109.781,-6.895 109.834,-6.88 109.889,-6.876 109.944,-6.88 109.998,-6.895 110.048,-6.918 110.093,-6.95 110.132,-6.989 110.164,-7.034 110.188,-7.085 110.202,-7.138 110.207,-7.193
  text "LNA" at 42.121,-7.084 h2.08
  text "ATT" at 22.225,-14.224 h2.08
  text "LPF" at 5.309,-26.521 h2.08 r90
  text "BPF" at 5.08,-50.8 h2.08 r90
  text "UA3REO" at 145.161,-52.959 h2.08 r90
  text "RF-UNIT-QRP rev21" at 147.447,-53.34 h1.25 r90
  text "HPF" at 27.432,-62.738 h1.67
  text "DAC" at 120.904,-64.516 h2.08
  text "2m" at 20.574,-65.151 h2 r90
  text "40" at 61.976,-66.04 h2.08 r90
  text "30" at 51.435,-67.183 h2.08 r90
  text "80" at 69.723,-68.707 h2.08 r90
  text "160" at 78.613,-70.485 h2.08 r90
  text "20,17" at 45.085,-71.12 h1.67 r90
  text "ADC" at 7.112,-74.803 h2.08
  text "15,12,10,6" at 36.957,-75.946 h1.67 r90
Bottom Overlay, Bot Silk:
  rectangle: 96.393,-29.21 99.695,-28.448

## Text inside footprints (layer, text, board x,y; h text height)
FAN_OUT: Mechanical 1, Top Assy "BOARD EDGE" at 125.479,-32.183 h0.42 r270